# Altium PCB role after.PcbDoc (part 2 of 2)
Units mm, origin at the board's own origin, x right, y up, seen from the top; angles counter-clockwise.
Board outline 425.96 x 184.94 mm, 2 copper layers (Top Layer, Bottom Layer); 206 components, 164 nets, 532 pads, 4 vias.
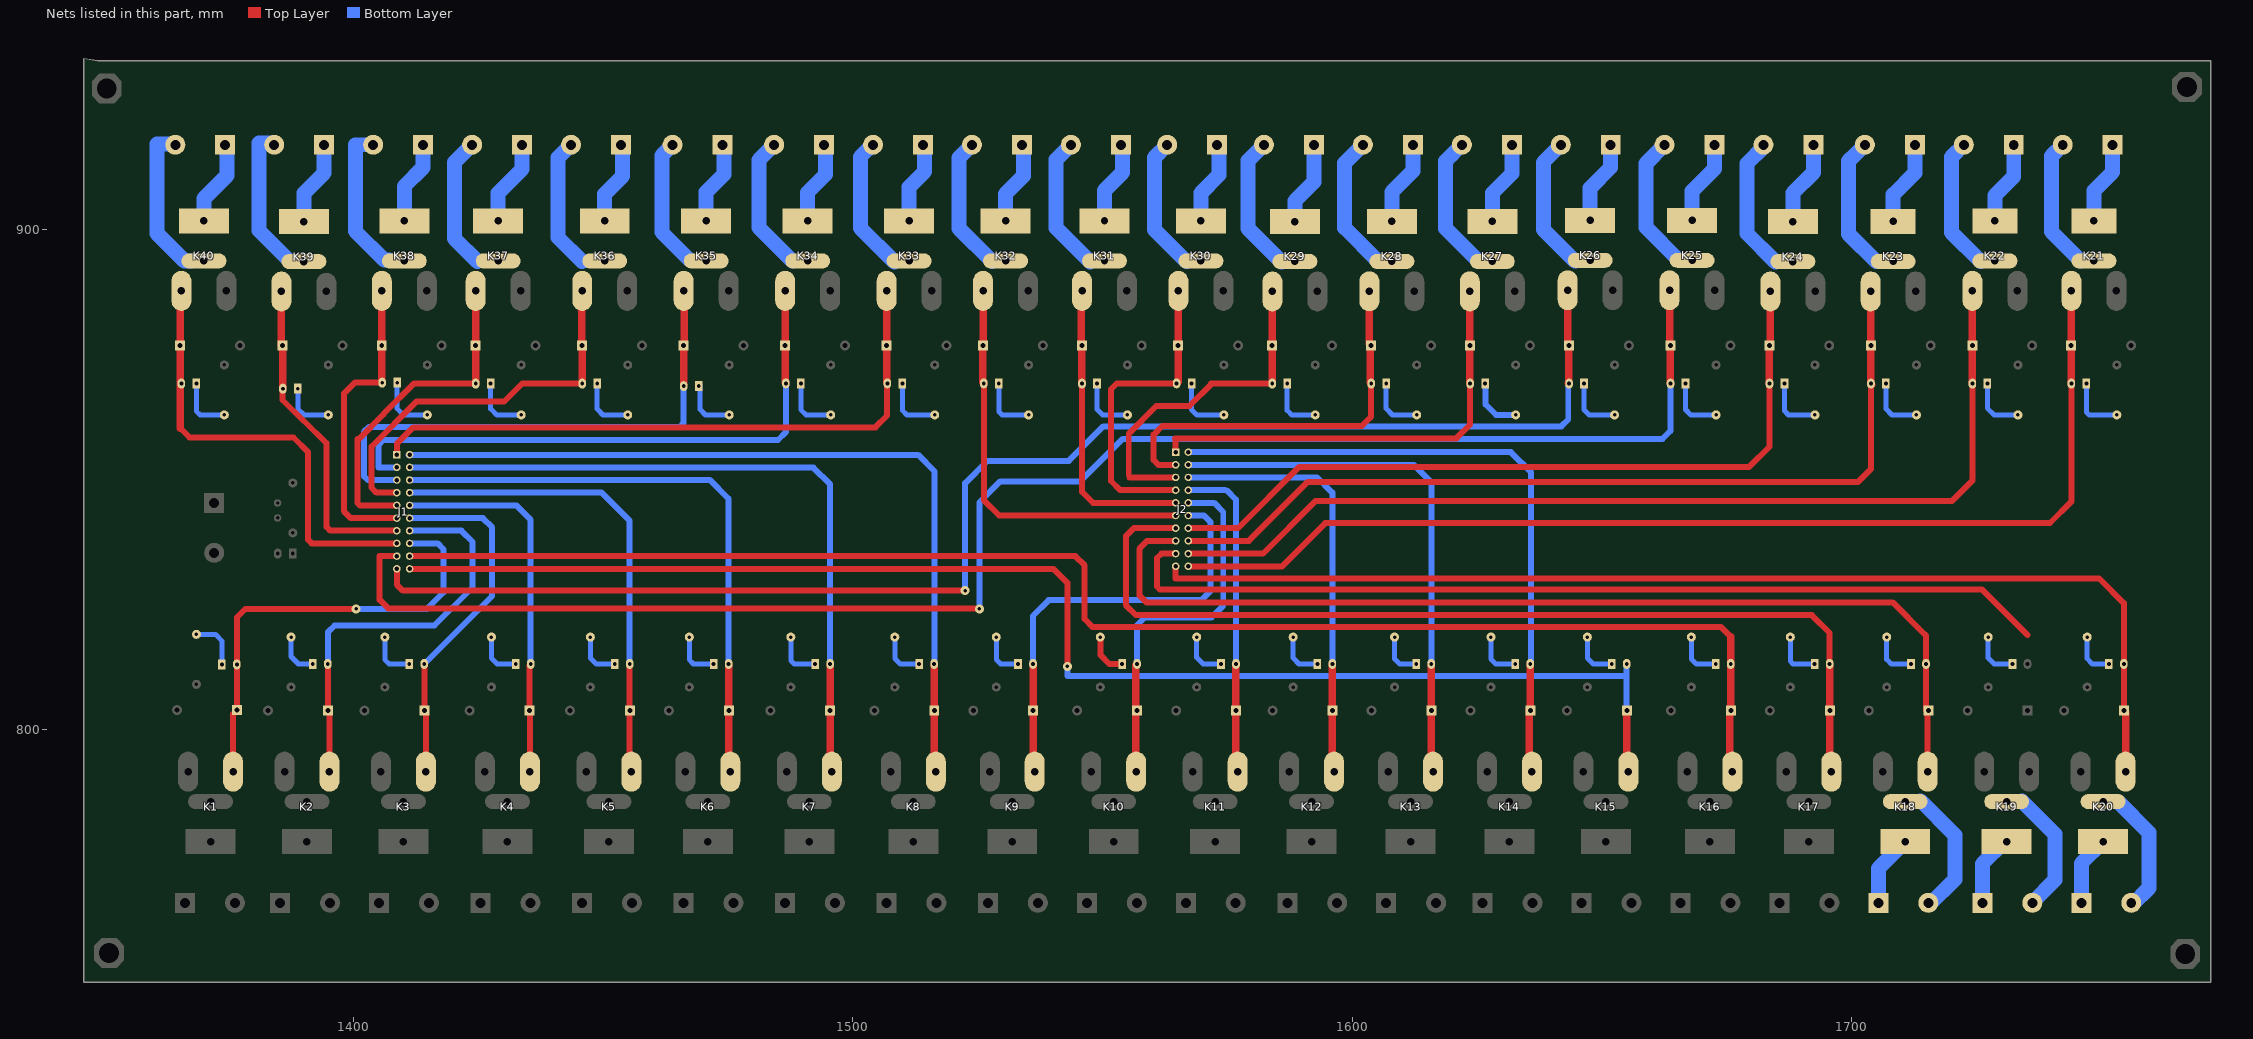
[diagram p2: the nets of this part, all layers, seen from the top]

## Via types
v1: diameter 1.8, hole 0.711, Top Layer to Bottom Layer, 4 vias

## Nets (pads, with @x,y where several pads share a name; then routed paths per layer and width w, separated by ;. In a path a pad name is that pad's centre, name@x,y a point inside that pad or via, vN(x,y) a via of type N, cw(c..) or ccw(c..) an arc to the next point about the centre after c; other vN are vias at no path point) (continued)
NetK18_1: K18.1 RL18.1 | length 14.5
  Bottom Layer w3: RL18.1@1705.348,765.213 1705.348,772.058 ; 1705.348,772.106 K18.1@1710.73,777.488
NetK18_2: K18.2 RL18.2 | length 25.8
  Bottom Layer w2.5: RL18.2@1715.567,764.819 RL18.2@1715.654,764.907 ; 1720.647,769.9 1720.685,769.938
  Bottom Layer w3: K18.2@1713.814,785.647 1720.647,778.815 1720.647,769.9 RL18.2@1715.654,764.907
NetK19_1: K19.1 RL19.1 | length 14.1
  Bottom Layer w3: RL19.1@1726.176,765.213 1726.176,773.016 ; 1726.176,773.024 1726.176,773.016 ; K19.1@1730.629,777.469 1726.176,773.016
NetK19_2: K19.2 RL19.2 | length 25.3
  Bottom Layer w2.5: RL19.2@1735.887,764.997 RL19.2@1736.139,765.25
  Bottom Layer w3: K19.2@1734.083,785.597 1740.687,778.993 1740.687,769.798 RL19.2@1736.139,765.25
NetK20_1: K20.1 RL20.1 | length 14
  Bottom Layer w3: RL20.1@1745.988,765.213 1745.988,773.024 ; 1745.988,773.122 K20.1@1750.354,777.488
NetK20_2: K20.2 RL20.2 | length 24.6
  Bottom Layer w2.5: RL20.2@1756.181,764.819 RL20.2@1756.282,764.92 ; 1759.56,768.121 1759.56,768.198
  Bottom Layer w3: K20.2@1753.438,785.393 1759.56,779.272 1759.56,768.198 RL20.2@1756.282,764.92
NetK21_1: K21.1 RL21.1 | length 16.8
  Bottom Layer w3: K21.1@1748.506,901.758 1748.506,907.817 ; 1748.506,907.817 1752.27,911.581 RL21.1@1752.27,917.016
NetK21_2: K21.2 RL21.2 | length 26.7
  Bottom Layer w2.5: K21.2@1748.749,894.001 K21.2@1748.75,894
  Bottom Layer w3: RL21.2@1742.27,917.016 1740,914.746 1740,899.619 K21.2@1745.894,893.724
NetK22_1: K22.1 RL22.1 | length 16.8
  Bottom Layer w3: K22.1@1728.694,901.758 1728.694,906.902 1732.458,910.666 RL22.1@1732.458,917.016
NetK22_2: K22.2 RL22.2 | length 26.8
  Bottom Layer w3: RL22.2@1722.458,917.016 1720,914.558 1720,899.451 K22.2@1725.828,893.623
NetK23_1: K23.1 RL23.1 | length 17.2
  Bottom Layer w3: K23.1@1708.318,901.652 1708.318,907.024 1712.646,911.352 RL23.1@1712.646,917.016
NetK23_2: K23.2 RL23.2 | length 27
  Bottom Layer w3: RL23.2@1702.646,917.016 1700.75,915.12 1699.387,913.757 1699.387,899.16 K23.2@1704.924,893.623
NetK24_1: K24.1 RL24.1 | length 17.1
  Bottom Layer w3: K24.1@1688.226,901.636 1688.226,907.354 1692.346,911.474 RL24.1@1692.346,917.016
NetK24_2: K24.2 RL24.2 | length 28.2
  Bottom Layer w2.5: RL24.2@1682.346,916.561 RL24.2@1682.346,917.016 ; K24.2@1684.757,893.521 K24.2@1685.646,893.521
  Bottom Layer w3: RL24.2@1682.346,916.561 1679,913.215 1679,899.278 K24.2@1684.757,893.521
NetK25_1: K25.1 RL25.1 | length 17
  Bottom Layer w3: K25.1@1668.038,901.878 1668.038,907.714 1672.534,912.21 RL25.1@1672.534,917.016
NetK25_2: K25.2 RL25.2 | length 27.4
  Bottom Layer w3: RL25.2@1662.534,917.016 1658.798,913.28 1658.798,900.481 K25.2@1665.376,893.902
NetK26_1: K26.1 RL26.1 | length 16.8
  Bottom Layer w3: K26.1@1647.64,901.886 1647.64,908.373 1651.758,912.491 RL26.1@1651.758,917.016
NetK26_2: K26.2 RL26.2 | length 27.4
  Bottom Layer w3: RL26.2@1641.758,917.016 1638.249,913.507 1638.249,900.049 K26.2@1644.574,893.724
NetK27_1: K27.1 RL27.1 | length 17
  Bottom Layer w3: K27.1@1628.04,901.66 1628.04,907.315 1631.946,911.221 RL27.1@1631.946,917.016
NetK27_2: K27.2 RL27.2 | length 27.5
  Bottom Layer w1.2: K27.2@1627.835,894.182 K27.2@1627.988,894.029
  Bottom Layer w3: RL27.2@1621.946,917.016 1619.936,915.006 1618.717,913.787 1618.717,900.226 K27.2@1625.219,893.724
NetK28_1: K28.1 RL28.1 | length 17.1
  Bottom Layer w3: K28.1@1607.926,901.674 1607.926,907.572 1612.134,911.78 RL28.1@1612.134,917.016
NetK28_2: K28.2 RL28.2 | length 27.7
  Bottom Layer w3: RL28.2@1602.134,917.016 1599.75,914.632 1598.473,913.355 1598.473,900.379 K28.2@1605.229,893.623
NetK29_1: K29.1 RL29.1 | length 16.6
  Bottom Layer w3: K29.1@1588.51,901.644 1588.51,905.784 1592.322,909.596 ; 1592.322,909.926 RL29.1@1592.322,917.016
NetK29_2: K29.2 RL29.2 | length 27.6
  Bottom Layer w3: RL29.2@1582.322,917.016 1579.143,913.837 1579.143,900.253 K29.2@1585.849,893.546
NetK30_1: K30.1 RL30.1 | length 16.7
  Bottom Layer w3: K30.1@1569.69,901.758 1569.69,907.36 1573.276,910.946 RL30.1@1573.276,917.016
NetK30_2: K30.2 RL30.2 | length 27.1
  Bottom Layer w3: RL30.2@1562.946,917.016 1560.398,914.468 1560.398,899.998 K30.2@1566.774,893.623
NetK31_1: K31.1 RL31.1 | length 16.8
  Bottom Layer w3: K31.1@1550.386,901.758 1550.386,907.868 ; 1550.386,907.868 1553.992,911.474 RL31.1@1553.992,917.016
NetK31_2: K31.2 RL31.2 | length 27.6
  Bottom Layer w3: RL31.2@1543.662,917.016 1540.662,914.016 1540.662,900.38 K31.2@1547.52,893.521
NetK32_1: K32.1 RL32.1 | length 16.8
  Bottom Layer w3: K32.1@1530.574,901.758 1530.574,907.182 ; 1530.574,907.182 1534.18,910.788 RL32.1@1534.18,917.016
NetK32_2: K32.2 RL32.2 | length 27.2
  Bottom Layer w3: RL32.2@1523.85,917.016 1521.25,914.416 1521.25,900.259 K32.2@1527.886,893.623
NetK33_1: K33.1 RL33.1 | length 16.4
  Bottom Layer w3: K33.1@1511.27,901.758 1511.27,908.579 ; 1511.27,908.579 1514.368,911.677 RL33.1@1514.368,916.838
NetK33_2: K33.2 RL33.2 | length 27.7
  Bottom Layer w2.5: RL33.2@1503.973,917.081 RL33.2@1504.163,917.27
  Bottom Layer w3: RL33.2@1503.973,917.081 1501.5,914.608 1501.5,900.349 K33.2@1508.328,893.521
NetK34_1: K34.1 RL34.1 | length 16.6
  Bottom Layer w3: K34.1@1490.95,901.758 1490.95,907.487 ; 1490.95,907.487 1494.556,911.093 RL34.1@1494.556,916.838
NetK34_2: K34.2 RL34.2 | length 27.3
  Bottom Layer w3: RL34.2@1484.226,917.016 1481.176,913.966 1481.176,900.43 K34.2@1487.881,893.724
NetK35_1: K35.1 RL35.1 | length 16.6
  Bottom Layer w3: K35.1@1470.63,901.758 1470.63,907.563 ; 1470.63,907.563 1474.17,911.103 RL35.1@1474.17,916.89
NetK35_2: K35.2 RL35.2 | length 26.3
  Bottom Layer w3: RL35.2@1463.886,917.016 1461.75,914.88 1461.75,899.51 K35.2@1467.358,893.902
NetK36_1: K36.1 RL36.1 | length 16.7
  Bottom Layer w3: K36.1@1450.31,901.758 1450.31,907.156 1453.896,910.742 RL36.1@1453.896,916.965
NetK36_2: K36.2 RL36.2 | length 28.1
  Bottom Layer w2.5: 1445.793,893.623 K36.2@1447.444,893.623
  Bottom Layer w3: RL36.2@1443.566,917.016 1441,914.45 1441,898.416 1445.793,893.623
NetK37_1: K37.1 RL37.1 | length 17.2
  Bottom Layer w3: K37.1@1428.974,901.758 1428.974,907.334 1433.754,912.114 RL37.1@1433.754,917.016
NetK37_2: K37.2 RL37.2 | length 27.7
  Bottom Layer w2.5: K37.2@1424.838,893.623 K37.2@1425.829,893.623
  Bottom Layer w3: RL37.2@1423.754,917.016 1420.25,913.512 1420.25,898.211 K37.2@1424.838,893.623
NetK38_1: K38.1 RL38.1 | length 16.8
  Bottom Layer w3: K38.1@1410.178,901.758 1410.178,908.706 ; 1410.178,908.706 1413.942,912.47 RL38.1@1413.942,917.016
NetK38_2: K38.2 RL38.2 | length 30
  Bottom Layer w3: RL38.2@1403.942,917.016 1400.378,917.016 1400.378,899.719 1406.195,893.902 K38.2@1407.109,893.902
NetK39_1: K39.1 RL39.1 | length 17.4
  Bottom Layer w1: RL39.1@1394.13,917.016 1394.254,917.14 RL39.1@1394.42,917.14
  Bottom Layer w3: K39.1@1390.068,901.636 1390.068,907.316 1394.13,911.377 RL39.1@1394.13,917.016
NetK39_2: K39.2 RL39.2 | length 30.1
  Bottom Layer w2.5: K39.2@1388.958,893.75 1389.072,893.636 K39.2@1390.068,893.636
  Bottom Layer w3: RL39.2@1384.13,917.39 1381.049,917.39 1381.049,917.016 1381.049,899.871 K39.2@1386.942,893.978
NetK40_1: K40.1 RL40.1 | length 17
  Bottom Layer w3: K40.1@1370.046,901.758 1370.046,906.242 1374.648,910.844 RL40.1@1374.648,916.889
NetK40_2: K40.2 RL40.2 | length 31.7
  Bottom Layer w2.5: K40.2@1368.808,894 1369.05,893.758 K40.2@1370.046,893.758
  Bottom Layer w3: 1360.653,917.169 1360.653,899.261 1366.152,893.762 K40.2@1367.447,893.762 ; 1360.754,917.14 RL40.2@1364.17,917.14
NetLED1_1: LED1.1 R1.2 | length 10.4
  Bottom Layer w1: R1.2@1368.552,818.968 1372.366,818.968 1373.648,817.686 LED1.1@1373.648,812.952
NetLED2_1: LED2.1 R2.2 | length 8.9
  Bottom Layer w1: R2.2@1387.492,818.431 1387.492,814.535 1388.977,813.051 LED2.1@1391.852,813.051
NetLED3_1: LED3.1 R3.2 | length 9.7
  Bottom Layer w1: R3.2@1406.288,818.431 1406.288,813.9 1407.138,813.051 LED3.1@1411.156,813.051
NetLED4_1: LED4.1 R4.2 | length 9.6
  Bottom Layer w1: R4.2@1427.624,818.431 1427.624,814.205 1428.779,813.051 LED4.1@1432.492,813.051
NetLED5_1: LED5.1 R5.2 | length 9.6
  Bottom Layer w1: R5.2@1447.436,818.431 1447.436,814.23 1448.616,813.051 LED5.1@1452.304,813.051
NetLED6_1: LED6.1 R6.2 | length 9.7
  Bottom Layer w1: R6.2@1467.248,818.431 1467.248,813.9 1468.098,813.051 LED6.1@1472.116,813.051
NetLED7_1: LED7.1 R7.2 | length 9.8
  Bottom Layer w1: R7.2@1487.568,818.431 1487.568,813.748 1488.265,813.051 LED7.1@1492.436,813.051
NetLED8_1: LED8.1 R8.2 | length 9.6
  Bottom Layer w1: R8.2@1508.396,818.431 1508.396,814.154 1509.5,813.051 LED8.1@1513.264,813.051
NetLED9_1: LED9.1 R9.2 | length 9.2
  Bottom Layer w1: R9.2@1528.716,818.431 1528.716,813.926 1529.591,813.051 LED9.1@1533.076,813.051
NetLED10_1: LED10.1 R10.2 | length 8.7
  Top Layer w1.2: R10.2@1549.544,818.431 1549.544,814.865 1551.359,813.051 LED10.1@1553.904,813.051
NetLED11_1: LED11.1 R11.2 | length 9.5
  Bottom Layer w1: R11.2@1568.848,818.431 1568.848,814.332 1570.13,813.051 LED11.1@1573.716,813.051
NetLED12_1: LED12.1 R12.2 | length 9.6
  Bottom Layer w1: R12.2@1588.152,818.431 1588.152,814.23 1589.332,813.051 LED12.1@1593.02,813.051
NetLED13_1: LED13.1 R13.2 | length 9.1
  Bottom Layer w1: R13.2@1608.472,818.431 1608.472,814.078 1609.5,813.051 LED13.1@1612.832,813.051
NetLED14_1: LED14.1 R14.2 | length 9.7
  Bottom Layer w1: R14.2@1627.776,818.431 1627.776,814.002 1628.727,813.051 LED14.1@1632.644,813.051
NetLED15_1: LED15.1 R15.2 | length 9.5
  Bottom Layer w1: R15.2@1647.08,818.431 1647.08,814.256 1648.285,813.051 LED15.1@1651.948,813.051
NetLED16_1: LED16.1 R16.2 | length 9.7
  Bottom Layer w1: R16.2@1667.908,818.431 1667.908,814.053 1668.91,813.051 LED16.1@1672.776,813.051
NetLED17_1: LED17.1 R17.2 | length 9.9
  Bottom Layer w1: R17.2@1687.72,818.431 1687.72,813.595 1688.265,813.051 LED17.1@1692.588,813.051
NetLED18_1: LED18.1 R18.2 | length 9.7
  Bottom Layer w1: R18.2@1707.024,818.431 1707.024,813.976 1707.95,813.051 LED18.1@1711.892,813.051
NetLED19_1: LED19.1 R19.2 | length 9.6
  Bottom Layer w1: R19.2@1727.344,818.431 1727.344,814.23 1728.524,813.051 LED19.1@1732.212,813.051
NetLED20_1: LED20.1 R20.2 | length 9.1
  Bottom Layer w1: R20.2@1747.156,818.431 1747.156,814.103 1748.209,813.051 LED20.1@1751.516,813.051
NetLED21_1: LED21.1 R21.2 | length 12
  Bottom Layer w1: LED21.1@1746.996,869.188 1746.996,863.514 1747.592,862.918 R21.2@1753.108,862.918
NetLED22_1: LED22.1 R22.2 | length 11.6
  Bottom Layer w1: LED22.1@1727.184,869.188 1727.184,864.276 1728.542,862.918 R22.2@1733.296,862.918
NetLED23_1: LED23.1 R23.2 | length 11.7
  Bottom Layer w1: LED23.1@1706.864,869.188 1706.864,864.149 1708.095,862.918 R23.2@1712.976,862.918
NetLED24_1: LED24.1 R24.2 | length 11.9
  Bottom Layer w1: LED24.1@1686.544,869.188 1686.544,863.743 1687.369,862.918 R24.2@1692.656,862.918
NetLED25_1: LED25.1 R25.2 | length 11.7
  Bottom Layer w1: LED25.1@1666.732,869.188 1666.732,863.997 1667.811,862.918 R25.2@1672.844,862.918
NetLED26_1: LED26.1 R26.2 | length 11.8
  Bottom Layer w1: LED26.1@1646.412,869.188 1646.412,863.972 1647.466,862.918 R26.2@1652.524,862.918
NetLED27_1: LED27.1 R27.2 | length 11
  Bottom Layer w1: R27.2@1632.531,862.982 R27.2@1632.525,862.963 ; R27.2@1632.525,862.963 1632.509,862.918 1632.509,862.889 1632.518,862.918 1632.537,862.975 R27.2@1632.525,862.963
  Bottom Layer w1.2: LED27.1@1626.692,868.934 1626.692,864.997 1628.771,862.918 1632.509,862.918 1632.518,862.918 R27.2@1632.712,862.918
NetLED28_1: LED28.1 R28.2 | length 11.6
  Bottom Layer w1: LED28.1@1606.788,869.188 1606.788,864.2 1608.07,862.918 R28.2@1612.9,862.918
NetLED29_1: LED29.1 R29.2 | length 11.3
  Bottom Layer w1: LED29.1@1586.976,869.188 1586.976,863.845 1587.903,862.918 R29.2@1592.58,862.918
NetLED30_1: LED30.1 R30.2 | length 12.2
  Bottom Layer w1: LED30.1@1567.82,869.238 1567.82,863.976 1568.878,862.918 R30.2@1574.292,862.918
NetLED31_1: LED31.1 R31.2 | length 11.7
  Bottom Layer w1: LED31.1@1548.876,869.188 1548.876,864.048 1550.006,862.918 R31.2@1554.988,862.918
NetLED32_1: LED32.1 R32.2 | length 11.9
  Bottom Layer w1: LED32.1@1529.212,869.238 1529.212,863.595 1529.889,862.918 R32.2@1535.176,862.918
NetLED33_1: LED33.1 R33.2 | length 12.2
  Bottom Layer w1: LED33.1@1509.908,869.238 1509.908,863.849 1510.839,862.918 R33.2@1516.38,862.918
NetLED34_1: LED34.1 R34.2 | length 11.7
  Bottom Layer w1: LED34.1@1489.588,869.238 1489.588,863.976 1490.646,862.918 R34.2@1495.552,862.918
NetLED35_1: LED35.1 R35.2 | length 11.6
  Bottom Layer w1: LED35.1@1469.12,869.188 1469.374,868.934 1469.374,868.68 1469.374,864.048 1470.504,862.918 R35.2@1475.232,862.918
NetLED36_1: LED36.1 R36.2 | length 11.7
  Bottom Layer w1: LED36.1@1448.8,869.188 1448.8,864.099 1449.981,862.918 R36.2@1454.912,862.918
NetLED37_1: LED37.1 R37.2 | length 11.7
  Bottom Layer w1: LED37.1@1427.464,869.188 1427.464,864.149 1428.695,862.918 R37.2@1433.576,862.918
NetLED38_1: LED38.1 R38.2 | length 11.8
  Bottom Layer w1: LED38.1@1408.744,869.378 1408.744,864.175 1410.001,862.918 R38.2@1414.78,862.918
NetLED39_1: LED39.1 R39.2 | length 10.6
  Bottom Layer w1: LED39.1@1388.856,868.172 1388.856,864.175 1390.113,862.918 R39.2@1394.968,862.918
NetLED40_1: LED40.1 R40.2 | length 11.4
  Bottom Layer w1: LED40.1@1368.536,869.188 1368.536,863.667 1369.285,862.918 R40.2@1374.14,862.918
RL1: D1.1 J1.16 K1.4 LED1.2 | length 90.6
  Top Layer w1.2: K1.4@1375.886,791.488 1375.886,803.014 D1.1@1376.68,803.808 LED1.2@1376.68,812.92 ; LED1.2@1376.648,812.952 LED1.2@1376.68,812.92 ; v1(1400.531,824.078) 1378.382,824.078 1376.68,822.376 1376.68,812.952 LED1.2@1376.68,812.92
  Bottom Layer w1.2: v1(1400.531,824.078) 1414.729,824.078 1418.031,827.38 1418.031,836.016 1416.863,837.184 J1.16@1411.224,837.184
RL2: D2.1 J1.14 K2.4 LED2.2 | length 83.4
  Top Layer w1.2: LED2.2@1394.852,813.051 1394.884,813.019 D2.1@1394.884,803.702 1395.19,803.396 K2.4@1395.19,791.488
  Bottom Layer w1.2: LED2.2@1394.884,813.019 1394.884,813.051 1394.884,819.421 1396.213,820.75 1416.202,820.75 1423.822,828.37 1423.822,837.489 1421.587,839.724 J1.14@1411.224,839.724
RL3: D3.1 J1.12 K3.4 LED3.2 | length 72
  Top Layer w1.2: LED3.2@1414.156,813.051 1414.188,813.019 D3.1@1414.188,803.702 1414.494,803.396 K3.4@1414.494,791.488
  Bottom Layer w1.2: J1.12@1411.224,842.264 1425.905,842.264 1427.759,840.41 1427.759,826.654 LED3.2@1414.156,813.051
RL4: D4.1 J1.10 K4.4 LED4.2 | length 76
  Top Layer w1.2: K4.4@1435.322,791.488 1435.322,803.646 D4.1@1435.266,803.702 1435.266,812.825 LED4.2@1435.492,813.051
  Bottom Layer w1.2: J1.10@1411.224,844.804 1432.611,844.804 1435.492,841.923 LED4.2@1435.492,813.051
RL5: D5.1 J1.8 K5.4 LED5.2 | length 96.8
  Top Layer w1.2: LED5.2@1455.304,813.051 1455.304,803.702 1455.304,791.827 K5.4@1455.642,791.488
  Bottom Layer w1.2: J1.8@1411.224,847.369 1449.68,847.369 1455.304,841.745 LED5.2@1455.304,813.051
RL6: D6.1 J1.6 K6.4 LED6.2 | length 119.5
  Top Layer w1.5: LED6.2@1475.116,813.051 1475.116,803.702 1475.116,792.85 K6.4@1475.613,792.353
  Bottom Layer w1.2: J1.6@1411.224,849.909 1471.32,849.909 1475.054,846.176 1475.054,830.275 1475.116,830.275 LED6.2@1475.116,813.051
RL7: D7.1 J1.4 K7.4 LED7.2 | length 143.3
  Top Layer w1.5: LED7.2@1495.436,813.051 1495.436,803.702 1495.436,791.827 K7.4@1495.774,791.488
  Bottom Layer w1.2: J1.4@1411.224,852.373 1492.098,852.373 1495.436,849.035 LED7.2@1495.436,813.051
RL8: D8.1 J1.2 K8.4 LED8.2 | length 166.5
  Top Layer w1.5: LED8.2@1516.264,813.051 1516.264,803.702 1516.264,792.164 K8.4@1516.532,791.896
  Bottom Layer w1.2: J1.2@1411.021,854.913 1411.224,854.913 1513.053,854.913 1516.38,851.586 LED8.2@1516.38,813.051
RL9: D9.1 J2.12 K9.4 LED9.2 | length 87.4
  Top Layer w1.5: K9.4@1536.065,791.743 1536.076,791.754 1536.076,803.702 LED9.2@1536.076,813.051
  Bottom Layer w1.2: LED9.2@1536.076,813.051 1536.076,822.691 1539.215,825.83 1569.796,825.83 1571.65,827.684 1571.65,841.451 1570.279,842.823 1570.228,842.772 J2.12@1567.18,842.772
RL10: D10.1 J2.10 K10.4 LED10.2 | length 74.3
  Top Layer w1.5: LED10.2@1556.69,812.825 1556.69,803.732 1556.69,791.896 K10.4@1556.842,791.743
  Bottom Layer w1.2: LED10.2@1556.904,813.051 1556.904,820.786 1558.493,822.376 1571.803,822.376 1574.165,824.738 1574.165,843.483 1572.336,845.312 J2.10@1567.18,845.312
RL11: D11.1 J2.8 K11.4 LED11.2 | length 63.8
  Top Layer w1.5: K11.4@1576.68,792.201 1576.716,792.237 1576.716,803.702 LED11.2@1576.716,813.051
  Bottom Layer w1.2: J2.8@1567.18,847.852 1574.546,847.852 ; 1574.84,847.812 1576.716,845.936 LED11.2@1576.716,813.051
RL12: D12.1 J2.6 K12.4 LED12.2 | length 85
  Top Layer w1.5: LED12.2@1596.02,813.051 1596.02,803.702 1596.02,792.545 K12.4@1596.06,792.505
  Bottom Layer w1.2: J2.6@1567.18,850.392 1592.986,850.392 1596.02,847.359 LED12.2@1596.02,813.051
RL13: D13.1 J2.4 K13.4 LED13.2 | length 106.3
  Top Layer w1.5: LED13.2@1615.832,813.051 1615.832,803.734 D13.1@1615.864,803.702 1615.864,793.174 K13.4@1615.923,793.115
  Bottom Layer w1.2: J2.4@1567.18,852.932 1612.316,852.932 1615.897,849.351 1615.897,813.584 LED13.2@1615.643,813.33
RL14: D14.1 J2.2 K14.4 LED14.2 | length 130
  Top Layer w1.5: K14.4@1635.608,791.896 1635.455,792.048 1635.455,803.702 1635.455,804.037 1635.644,804.226 LED14.2@1635.644,813.051
  Bottom Layer w1.2: J2.2@1567.18,855.472 1631.747,855.472 1635.811,851.408 LED14.2@1635.811,813.051
RL15: D15.1 J1.20 K15.4 LED15.2 | length 285.9
  Top Layer w1.2: J1.20@1411.224,832.104 1540.154,832.104 1542.948,829.31 v1(1542.948,812.571)
  Top Layer w1.5: D15.1@1654.948,803.734 D15.1@1654.98,803.702 1654.98,791.488 1654.98,791.421 1655.099,791.302 K15.4@1655.445,790.956
  Bottom Layer w1.2: v1(1542.948,812.571) 1542.948,810.666 1654.948,810.666 ; LED15.2@1654.948,813.051 1654.948,810.666 ; D15.1@1654.98,803.702 1654.948,803.734 1654.948,810.666
RL16: D16.1 J1.18 K16.4 LED16.2 | length 305
  Top Layer w1.2: J1.18@1411.224,834.644 1544.549,834.644 1546.403,832.79 1546.403,822.046 1547.952,820.496 1673.809,820.496 1675.776,818.53
  Top Layer w1.5: 1675.776,818.53 LED16.2@1675.776,813.051 1675.776,804.048 1675.619,803.891 1675.613,803.885 1675.613,803.702 1675.613,792.201 1676.22,791.594 K16.4@1676.375,791.439
RL17: D17.1 J2.13 K17.4 LED17.2 | length 195.3
  Top Layer w1.2: J2.13@1564.64,840.232 1556.258,840.232 1554.658,838.632 1554.658,824.84 1556.69,822.808 1692.032,822.808 1695.588,819.252 LED17.2@1695.588,813.051
  Top Layer w1.5: LED17.2@1695.588,813.051 1695.588,803.734 D17.1@1695.62,803.702 1695.62,791.878 K17.4@1695.755,791.743
RL18: D18.1 J2.15 K18.4 LED18.2 | length 204.6
  Top Layer w1.2: J2.15@1564.64,837.692 1558.925,837.692 1557.35,836.117 1557.35,826.795 1558.747,825.398 1708.201,825.398 1714.642,818.958 ; LED18.2@1714.892,813.051 1714.892,818.718 ; D18.1@1714.906,803.738 LED18.2@1714.906,812.546 ; K18.4@1715.23,791.488 1715.23,803.501 D18.1@1715.432,803.702
RL19: J2.17 | length 188.1
  Top Layer w1.2: J2.17@1564.64,835.152 1561.795,835.152 1560.906,834.263 1560.906,828.548 1561.541,827.913 1726.133,827.913 1735.163,818.883
RL20: D20.1 J2.19 K20.4 LED20.2 | length 228.2
  Top Layer w1.2: J2.19@1564.64,832.612 1564.64,830.199 1749.527,830.199 1754.516,825.21 LED20.2@1754.516,813.051 1754.548,813.019 D20.1@1754.548,803.702 D20.1@1754.854,803.396
  Top Layer w1.5: K20.4@1754.854,791.488 D20.1@1754.854,803.396
RL21: D21.1 J2.20 K21.4 LED21.2 | length 224.5
  Top Layer w1.2: J2.20@1567.18,832.612 1585.976,832.612 1594.625,841.261 ; 1594.561,841.324 1594.578,841.324 1594.633,841.269 1739.718,841.269 1743.996,845.547 LED21.2@1743.996,869.188
  Top Layer w1.5: LED21.2@1743.996,869.188 1743.964,869.22 D21.1@1743.964,876.808 1744.006,876.85 K21.4@1744.006,887.758
RL22: D22.1 J2.18 K22.4 LED22.2 | length 201.1
  Top Layer w1.2: J2.18@1567.18,835.152 1582.115,835.152 1592.605,845.642 1720.063,845.642 1724.184,849.764 LED22.2@1724.184,869.188
  Top Layer w1.5: LED22.2@1724.184,869.188 1724.152,869.22 D22.1@1724.152,876.808 1724.194,876.85 K22.4@1724.194,887.758
RL23: D23.1 J2.16 K23.4 LED23.2 | length 178.4
  Top Layer w1.2: J2.16@1567.18,837.692 1579.296,837.692 1591.107,849.503 1701.292,849.503 1703.832,852.043 LED23.2@1703.832,869.168
  Top Layer w1.5: K23.4@1703.818,887.652 1703.818,876.822 D23.1@1703.832,876.808 1703.832,869.188 1703.832,869.168 1703.838,869.162 LED23.2@1704,869
RL24: D24.1 J2.14 K24.4 LED24.2 | length 153.7
  Top Layer w1.2: J2.14@1567.18,840.232 1577.111,840.232 1589.392,852.513 1679.486,852.513 1683.544,856.571 LED24.2@1683.544,869.188
  Top Layer w1.5: D24.1@1683.512,876.808 1683.512,869.22 LED24.2@1683.544,869.188 ; D24.1@1683.726,877.326 K24.4@1683.726,887.636
RL25: D25.1 J1.17 K25.4 LED25.2 | length 326.8
  Top Layer w1.2: J1.17@1408.684,834.644 1405.23,834.644 1405.23,825.881 1406.931,824.179 v1@1525.219,824.179
  Top Layer w1.5: K25.4@1663.538,887.878 1663.538,876.97 D25.1@1663.7,876.808 1663.7,869.22 LED25.2@1663.732,869.188
  Bottom Layer w1.2: v1(1525.346,824.103) 1525.346,845.414 1529.544,849.611 1545.546,849.611 1554.048,858.114 1662.125,858.114 1663.7,859.688 1663.7,869.188 LED25.2@1663.7,869.22
RL26: D26.1 J1.19 K26.4 LED26.2 | length 290.9
  Top Layer w1.2: J1.19@1408.684,832.104 1408.684,829.513 1408.676,828.931 1409.88,827.71 v1@1522.273,827.71
  Top Layer w1.5: K26.4@1643.14,887.886 1643.14,877.048 D26.1@1643.38,876.808 1643.38,869.38 1643.3,869.3 LED26.2@1643.25,869.25
  Bottom Layer w1.2: v1(1522.501,827.71) 1522.501,849.249 1526.965,853.713 1543.247,853.713 1550.162,860.628 1641.881,860.628 1643.25,861.997 1643.25,869.188 LED26.2@1643.25,869.25
RL27: D27.1 J2.1 K27.4 LED27.2 | length 89.7
  Top Layer w1.2: J2.1@1564.64,855.472 1564.64,858.114 1564.538,858.215 1620.825,858.215 1623.568,860.958 1623.568,869.188 LED27.2@1623.568,869.22
  Top Layer w1.5: K27.4@1623.54,887.66 1623.54,876.836 D27.1@1623.568,876.808 1623.568,869.22 LED27.2@1623.6,869.188
RL28: D28.1 J2.3 K28.4 LED28.2 | length 79.9
  Top Layer w1.2: J2.3@1564.64,852.932 1561.186,852.932 1560.22,853.897 1560.22,858.952 1561.973,860.704 1601.699,860.704 ; 1601.927,860.704 1603.654,862.432 ; 1603.788,862.635 LED28.2@1603.788,869.188
  Top Layer w1.5: K28.4@1603.426,887.674 1603.426,877.138 D28.1@1603.597,876.967 ; D28.1@1603.756,876.808 D28.1@1603.597,876.967 ; LED28.2@1603.788,869.188 1603.597,869.379 1603.597,876.808 D28.1@1603.597,876.967
RL29: D29.1 J2.5 K29.4 LED29.2 | length 68.6
  Top Layer w1.2: 1555.242,850.875 1555.242,859.18 1560.754,864.692 1567.383,864.692 1571.879,869.188 ; 1555.42,850.392 J2.5@1564.64,850.392 ; 1571.676,869.188 1571.879,869.188 ; LED29.2@1583.976,869.188 1571.879,869.188
  Top Layer w1.5: D29.1@1583.944,876.808 1583.944,869.22 LED29.2@1583.976,869.188 ; D29.1@1584.01,877.326 K29.4@1584.01,887.644
RL30: D30.1 J2.7 K30.4 LED30.2 | length 64.4
  Top Layer w1.2: J2.7@1564.64,847.852 1553.515,847.852 1551.686,849.681 1551.686,868.045 1552.879,869.238 LED30.2@1564.82,869.238
  Top Layer w1.5: LED30.2@1564.82,869.238 1565.148,869.566 D30.1@1565.148,876.808 1565.19,876.85 K30.4@1565.19,887.758
RL31: D31.1 J2.9 K31.4 LED31.2 | length 59.7
  Top Layer w1.2: LED31.2@1545.876,869.188 1545.876,847.515 1548.079,845.312 J2.9@1564.64,845.312
  Top Layer w1.5: K31.4@1545.75,887.5 1545.75,876.902 D31.1@1545.844,876.808 1545.844,869.22 LED31.2@1545.876,869.188
RL32: D32.1 J2.11 K32.4 LED32.2 | length 81.7
  Top Layer w1.2: LED32.2@1526.212,869.238 1526.212,845.869 1529.309,842.772 J2.11@1564.64,842.772
  Top Layer w1.5: K32.4@1526.074,887.758 1526.074,876.85 D32.1@1526.032,876.808 1526.032,869.418 LED32.2@1526.212,869.238
RL33: D33.1 J1.1 K33.4 LED33.2 | length 127.7
  Top Layer w1.2: J1.1@1408.684,854.964 1408.684,857.123 1411.986,860.425 1504.493,860.425 1506.83,862.762 1506.83,869.16 LED33.2@1506.908,869.238
  Top Layer w1.5: K33.4@1506.77,887.758 1506.77,876.818 D33.1@1506.76,876.808 1506.76,869.386 LED33.2@1506.908,869.238
RL34: D34.1 J1.3 K34.4 LED34.2 | length 119.5
  Top Layer w1.5: K34.4@1486.25,888 1486.25,887.958 K34.4@1486.45,887.758 1486.45,876.808 1486.45,869.376 LED34.2@1486.588,869.238
  Bottom Layer w1.2: 1405.026,852.424 1405.026,852.475 ; J1.3@1408.684,852.424 1405.077,852.424 1405.026,852.475 ; LED34.2@1486.588,869.238 1486.588,859.462 1485.011,857.885 1406.017,857.885 1405.026,856.894 1405.026,852.475
RL35: D35.1 J1.5 K35.4 LED35.2 | length 106.1
  Top Layer w1.5: LED35.2@1466.12,869.188 1466.088,869.22 D35.1@1466.088,876.808 1466.25,876.97 K35.4@1466.25,887.25
  Bottom Layer w1.2: 1402.08,850.595 1402.08,850.697 ; J1.5@1408.684,849.884 1402.893,849.884 1402.08,850.697 ; LED35.2@1466.12,868.68 1466.12,861.321 1465.301,860.501 1403.071,860.501 1402.08,859.511 1402.08,850.697
RL36: D36.1 J1.7 K36.4 LED36.2 | length 79.5
  Top Layer w1.2: J1.7@1408.684,847.344 1404.595,847.344 1403.604,848.335 1403.604,856.564 1412.596,865.556 1430.147,865.556 1433.811,869.22 LED36.2@1445.768,869.22
  Top Layer w1.5: K36.4@1445.75,887.5 1445.75,876.826 D36.1@1445.768,876.808 1445.768,869.22 LED36.2@1445.8,869.188
RL37: D37.1 J1.9 K37.4 LED37.2 | length 67
  Top Layer w1.2: 1400.81,858.063 1400.81,845.287 1401.293,844.804 J1.9@1408.684,844.804 ; 1401.216,858.241 1406.004,863.029 ; 1406.119,863.219 1412.088,869.188 LED37.2@1424.464,869.188
  Top Layer w1.5: LED37.2@1424.464,869.188 1424.464,876.566 1424.474,876.576 1424.474,876.808 K37.4@1424.474,887.758
RL38: D38.1 J1.11 K38.4 LED38.2 | length 61.5
  Top Layer w1.2: LED38.2@1405.744,869.378 1400.263,869.378 1398.067,867.181 1398.067,843.636 1399.438,842.264 J1.11@1408.684,842.264
  Top Layer w1.5: LED38.2@1405.66,869.59 1405.66,876.316 1405.678,876.334 1405.678,876.808 K38.4@1405.678,887.758
RL39: D39.1 J1.13 K39.4 LED39.2 | length 65.4
  Top Layer w1.2: LED39.2@1385.8,868.228 1385.8,868.172 1385.8,865.913 1385.799,865.911 1394.607,857.276 1394.607,840.486 1395.369,839.724 J1.13@1408.684,839.724
  Top Layer w1.5: K39.4@1385.568,887.636 1385.568,876.808 1385.568,876.676 1385.618,876.626 1385.8,876.444 1385.8,868.228 LED39.2@1385.856,868.172
RL40: D40.1 J1.15 K40.4 LED40.2 | length 90.7
  Top Layer w1.2: 1365.278,860.295 1367.18,858.393 1387.983,858.393 1390.904,855.472 ; 1390.904,855.497 1390.904,855.472 ; J1.15@1408.684,837.184 1391.641,837.184 1390.904,837.921 1390.904,855.472
  Top Layer w1.5: 1365.278,860.295 1365.278,869.188 D40.1@1365.278,876.808 K40.4@1365.278,887.758

## Polygon pours and split planes (outlines as drawn)
GND on Top Layer "Top Layer-GND" (solid, pour order 1000): 1345.743,933.399 1771.472,933.399 1771.472,749.808 1345.336,749.808 1345.336,933.399
GND on Bottom Layer "Bottom Layer-GND" (solid, pour order 1001): 1346.505,933.602 1772.056,933.602 1772.056,749.91 1345.997,749.91 1345.997,933.094

## Silkscreen, mask and mechanical layers (free items; w line width, h text height)
Top Overlay:
  region: 1561.833,855.345 1558.709,853.643 1558.709,856.412
  region: 1404.176,856.082 1406.258,854.862 1404.048,854.1
  text "Nguyen Dinh Cuong" at 1590.726,845.591 h8
  text "+12V" at 1377.798,844.804 h1.52
  text "email: nguyendinhcuong7hau@gmail.com" at 1590.218,837.59 h6
  text "GND" at 1377.975,834.771 h1.52
  text "Mobile: 0979 158 098" at 1590.065,831.342 h6

## Text inside footprints (layer, text, board x,y; h text height)
J1: Top Overlay "20" at 1410.716,830.58 h1.27 r270; Top Overlay "19" at 1408.176,830.58 h1.27 r270; Top Overlay "1" at 1408.176,857.504 h1.27 r270; Top Overlay "2" at 1410.716,857.504 h1.27 r270
J2: Top Overlay "2" at 1566.672,858.012 h1.27 r270; Top Overlay "1" at 1564.132,858.012 h1.27 r270; Top Overlay "19" at 1564.132,831.088 h1.27 r270; Top Overlay "20" at 1566.672,831.088 h1.27 r270